# EAGLE board PCB (EAGLE 6.5.0)
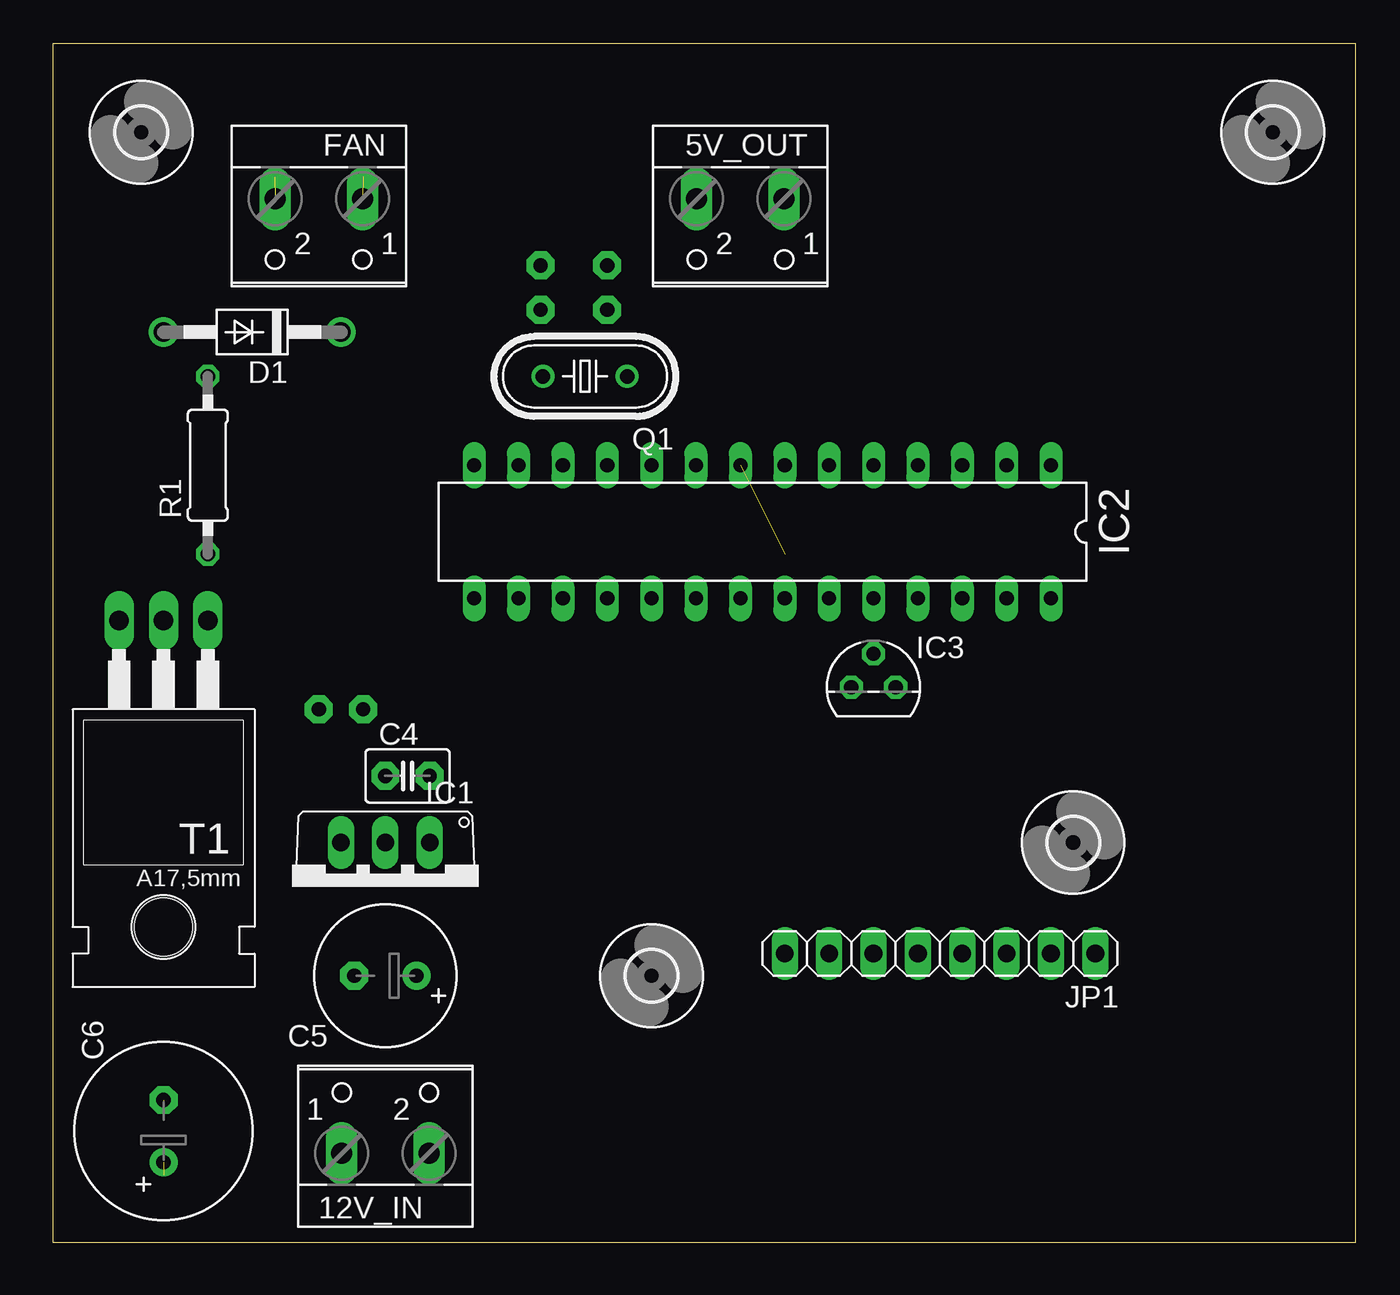
[diagram p0: board, top side]
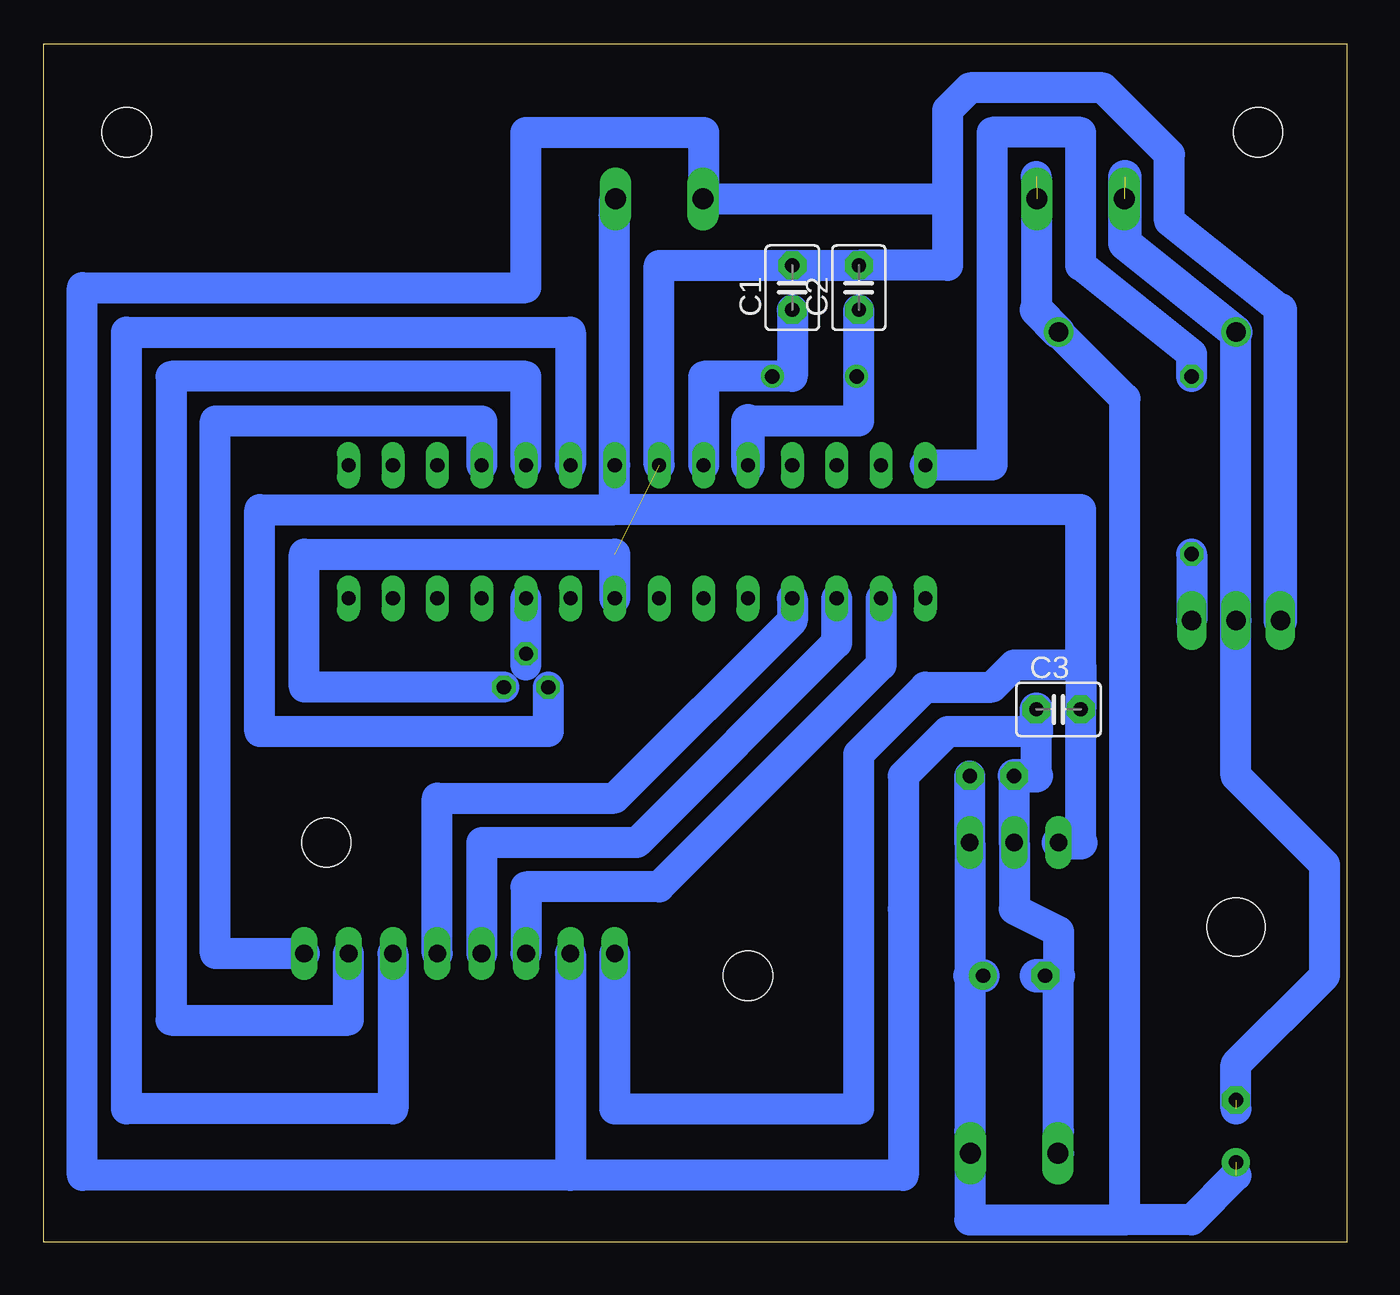
[diagram p1: board, bottom side, seen from below]

Size 74.6 x 68.57 mm. Coordinates in mm from the lower left corner, seen from the top.
Outline: 0,0 74.6,0 74.6,68.57 0,68.57 0,0
Copper layers (1*16): Top 0.035mm / dielectric 1.5mm / Bottom 0.035mm
Design rules "default *": minimum track width 10mil, minimum drill 24mil, track to track 12mil, track to pad 8mil, pad to pad 8mil, via to via 8mil, smd to smd 8mil, copper to edge 40mil, drill to drill 8mil, minimum pad ring 10mil, minimum via ring 8mil, stop-mask expansion 4mil, vias tented up to drill 0mil, thermal gap 10mil

## Footprints (pad centres in the part's own frame; a part is rotated, then mirrored left to right if it is on the bottom)
W237-102 = drill 1.194 long: 1 -2.5,-1.27; 2 2.5,-1.27
C2.5-3 = drill 0.813 pad 1.6 octagon: 1 -1.27,0; 2 1.27,0
E3,5-8 = drill 0.813 pad 1.6: + -1.778,0 | drill 0.813 pad 1.6 octagon: - 1.778,0
E3,5-10 = drill 0.813 pad 1.6: + -1.778,0 | drill 0.813 pad 1.6 octagon: - 1.778,0
DO41-10 = drill 1.118: A 5.08,0; C -5.08,0
2,8 = hole 2.8: 0,0
TO220V = drill 1.016 long: 1 -2.54,-2.54; 2 0,-2.54; 3 2.54,-2.54
DIL28-3 = drill 0.813 long: 1 -16.51,-3.81; 2 -13.97,-3.81; 3 -11.43,-3.81; 4 -8.89,-3.81; 5 -6.35,-3.81; 6 -3.81,-3.81; 7 -1.27,-3.81; 8 1.27,-3.81; 9 3.81,-3.81; 10 6.35,-3.81; 11 8.89,-3.81; 12 11.43,-3.81; 13 13.97,-3.81; 14 16.51,-3.81; 15 16.51,3.81; 16 13.97,3.81; 17 11.43,3.81; 18 8.89,3.81; 19 6.35,3.81; 20 3.81,3.81; 21 1.27,3.81; 22 -1.27,3.81; 23 -3.81,3.81; 24 -6.35,3.81; 25 -8.89,3.81; 26 -11.43,3.81; 27 -13.97,3.81; 28 -16.51,3.81
TO92 = drill 0.813 octagon: 1 -1.27,0; 2 0,1.905; 3 1.27,0
1X08 = drill 1.016 long: 1 -8.89,0; 2 -6.35,0; 3 -3.81,0; 4 -1.27,0; 5 1.27,0; 6 3.81,0; 7 6.35,0; 8 8.89,0
HC49U-V = drill 0.813: 1 -2.413,0; 2 2.413,0
0207/10 = drill 0.813 octagon: 1 -5.08,0; 2 5.08,0
TO220 = drill 1.118 long: 1 -2.54,-6.35; 2 0,-6.35; 3 2.54,-6.35 | hole 3.302: 0,11.176

## Placement (x,y rotation side)
5V_OUT  [W237-102]  39.37,58.42 180 top
12V_IN  [W237-102]  19.05,6.35 0 top
C1  22 pF  [C2.5-3]  31.75,54.61 90 bottom
C2  22 pF  [C2.5-3]  27.94,54.61 90 bottom
C3  100 nF  [C2.5-3]  16.51,30.48 0 bottom
C4  100 nF  [C2.5-3]  20.32,26.67 0 top
C5  1000 uF  [E3,5-8]  19.05,15.24 180 top
C6  2200uF  [E3,5-10]  6.35,6.35 90 top
D1  1N4004  [DO41-10]  11.43,52.07 180 top
FAN  [W237-102]  15.24,58.42 180 top
H1  MOUNT-HOLE2.8  [2,8]  34.29,15.24 0 top
H2  MOUNT-HOLE2.8  [2,8]  5.08,63.5 0 top
H3  MOUNT-HOLE2.8  [2,8]  58.42,22.86 0 top
H4  MOUNT-HOLE2.8  [2,8]  69.85,63.5 0 top
IC1  7805TV  [TO220V]  19.05,20.32 180 top
IC2  ATMEGA168-PU  [DIL28-3]  40.64,40.64 180 top
IC3  LM35CZ  [TO92]  46.99,31.75 0 top
JP1  LCD  [1X08]  50.8,16.51 180 top
Q1  [HC49U-V]  30.48,49.53 180 top
R1  [0207/10]  8.89,44.45 90 top
T1  TIP122  [TO220]  6.35,29.21 180 top

## Library data of the parts
5V_OUT 12V_IN FAN = con-wago-500; MPN: 237-102; OC_FARNELL: unknown; OC_NEWARK: 70K9898
C1-C4 = capacitor-wima
C5 R1 = rcl
C6 = resistor
D1 = diode
H1-H4 = holes
IC1 = linear
IC2 = Arduino-AVR
IC3 = lm35
JP1 = pinhead
Q1 = crystal; OC_FARNELL: 1666969; OC_NEWARK: unknown
T1 = transistor

## Nets
GND: 5V_OUT.2 C1.2 C2.2 IC2.8 IC2.22 IC3.3 JP1.7 T1.3
N$1: C1.1 IC2.9 Q1.1
N$2: IC2.16 JP1.6
N$3: C6.- D1.A FAN.2 T1.2
N$4: C2.1 IC2.10 Q1.2
N$5: 12V_IN.1 C3.1 C4.1 C5.- IC1.2
N$6: IC2.4 JP1.1
N$7: IC2.5 JP1.2
N$8: IC2.6 JP1.3
N$9: R1.1 T1.1
N$10: IC2.17 JP1.5
N$11: IC2.18 JP1.4
N$12: IC2.14 R1.2
N$14: IC2.24 IC3.2
N$18: 12V_IN.2 C4.2 C5.+ C6.+ D1.C FAN.1 IC1.1
VCC: 5V_OUT.1 C3.2 IC1.3 IC2.7 IC3.1 JP1.8

## Tracks (layer width: path | path; a pad name or v marks a point on that pad's centre or on a via)
GND  (1 unrouted)
  Bottom 0.254: 36.83,59.69 5V_OUT.2
  Bottom 1.778: 3.81,53.34 10.16,58.42 10.16,62.23 13.97,66.04 21.59,66.04 22.86,64.77 22.86,59.69 | IC2.8 39.37,55.88 C1.2 C2.2 22.86,55.88 22.86,59.69 | 22.86,59.69 36.83,59.69 36.83,63.5 46.99,63.5 46.99,54.61 72.39,54.61 72.39,3.81 44.45,3.81 | 25.4,19.05 25.4,3.81 44.45,3.81 | JP1.7 44.45,3.81 | IC3.3 59.69,31.75 59.69,39.37 41.91,39.37 IC2.22
  Bottom 1.93: T1.3 3.81,53.34
N$1
  Bottom 0.254: 31.75,49.53 Q1.1
  Bottom 1.778: C1.1 31.75,49.53 36.83,49.53 IC2.9
N$2
  Bottom 1.778: IC2.16 26.67,33.02 39.37,20.32 46.99,20.32 JP1.6
N$3  (2 unrouted)
  Bottom 1.778: 6.35,7.62 6.35,10.16 1.27,15.24 1.27,21.59 6.35,26.67 T1.2 D1.A
  Bottom 1.93: D1.A 12.7,57.15 12.7,60.96
N$4
  Bottom 0.254: 27.94,49.53 Q1.2
  Bottom 1.778: 34.29,46.99 27.94,46.99 27.94,49.53 C2.1
  Bottom 1.93: IC2.10 34.29,46.99
N$5
  Bottom 0.254: 16.51,15.24 C5.- | 16.51,6.35 12V_IN.1
  Bottom 1.778: C4.1 IC1.2 19.05,19.05 16.51,17.78 16.51,15.24 16.51,6.35 16.51,5.08 | 17.78,26.67 17.78,29.21 22.86,29.21 25.4,26.67 25.4,19.05
  Bottom 1.93: C4.1 17.78,26.67 | 17.78,29.21 C3.1 | 16.51,15.24 17.78,15.24
N$6
  Bottom 1.778: JP1.1 64.77,16.51 64.77,46.99 49.53,46.99 IC2.4
N$7
  Bottom 1.778: IC2.5 46.99,49.53 67.31,49.53 67.31,12.7 57.15,12.7 JP1.2
N$8
  Bottom 1.778: JP1.3 54.61,7.62 69.85,7.62 69.85,52.07 44.45,52.07 IC2.6
N$9
  Bottom 1.778: R1.1 T1.1
N$10
  Bottom 1.778: IC2.17 29.21,34.29 40.64,22.86 49.53,22.86 JP1.5
N$11
  Bottom 1.778: IC2.18 31.75,35.56 41.91,25.4 52.07,25.4 JP1.4
N$12
  Bottom 1.778: IC2.14 20.32,44.45 20.32,63.5 15.24,63.5 15.24,55.88 8.89,50.8 R1.2
N$14
  Bottom 0.254: IC3.2 46.53,32.8 46.53,33.56 46.99,33.02
  Bottom 1.778: 46.99,33.02 IC2.24
N$18  (2 unrouted)
  Bottom 0.254: 21.59,6.35 12V_IN.2
  Bottom 1.778: 6.35,3.81 8.89,1.27 12.7,1.27 | 17.78,60.96 17.78,53.34 | C4.2 IC1.1 21.59,15.24 21.59,6.35 21.59,1.27 12.7,1.27 | 12.7,1.27 12.7,48.26 D1.C
  Bottom 1.93: 17.78,53.34 D1.C | C5.+ 21.59,15.24
VCC
  Bottom 0.254: 5V_OUT.1 42.72,58.74 41.91,58.74
  Bottom 1.778: 15.24,22.86 C3.2 15.24,33.02 | 41.91,59.69 41.91,58.74 IC2.7 41.91,41.91 | JP1.8 41.91,7.62 27.94,7.62 27.94,27.94 24.13,31.75 20.32,31.75 19.05,33.02 15.24,33.02 | 15.24,33.02 15.24,41.91 41.91,41.91 | IC3.1 45.72,29.21 62.23,29.21 62.23,41.91 41.91,41.91
  Bottom 1.93: IC1.3 15.24,22.86